# Altium PCB PCB2.PcbDoc
Units mil, origin at the board's own origin, x right, y up, seen from the top; angles counter-clockwise.
Board outline 1770 x 1435 mil, 2 copper layers (Top Layer, Bottom Layer); 11 components, 9 nets, 86 pads, 10 vias.
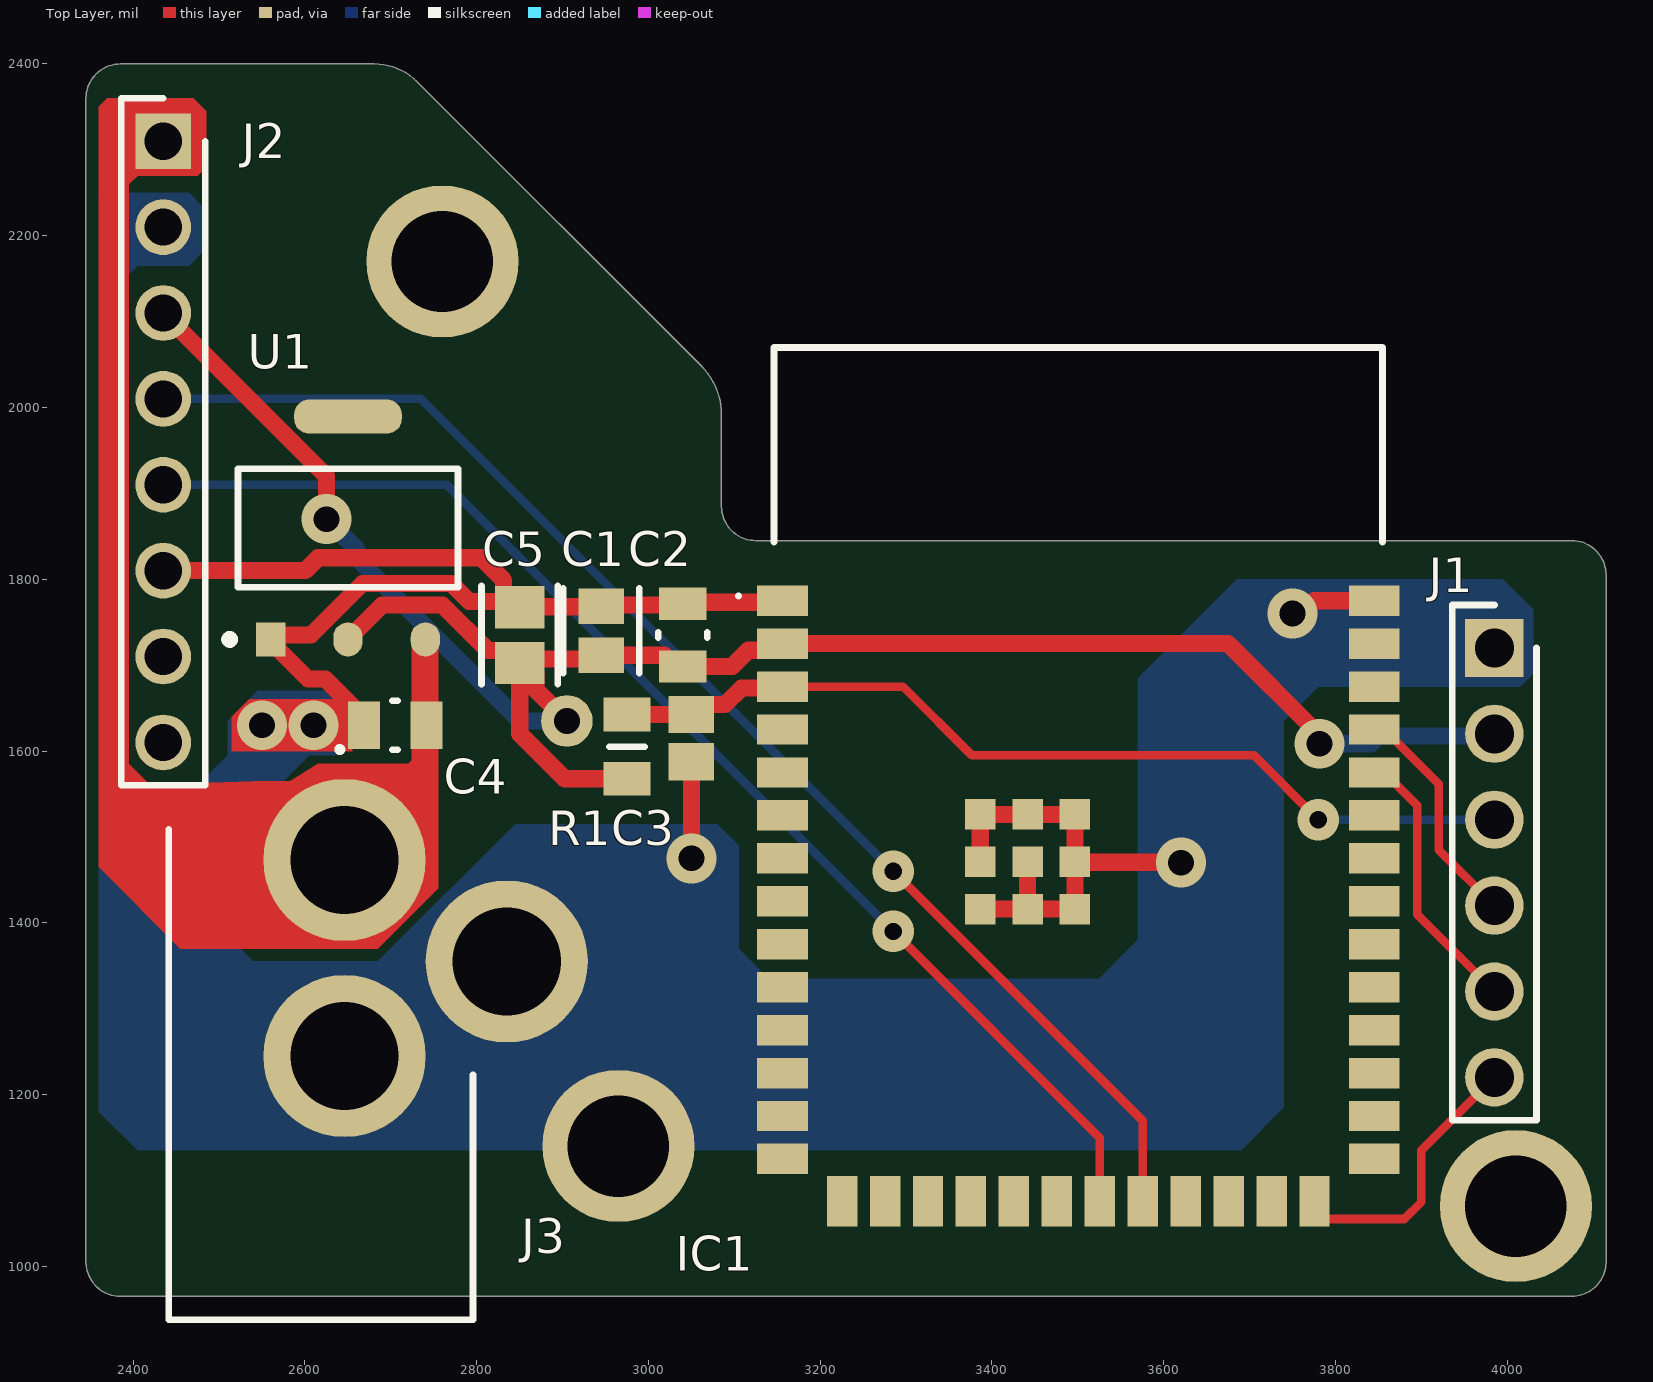
[diagram p0: Top Layer view]
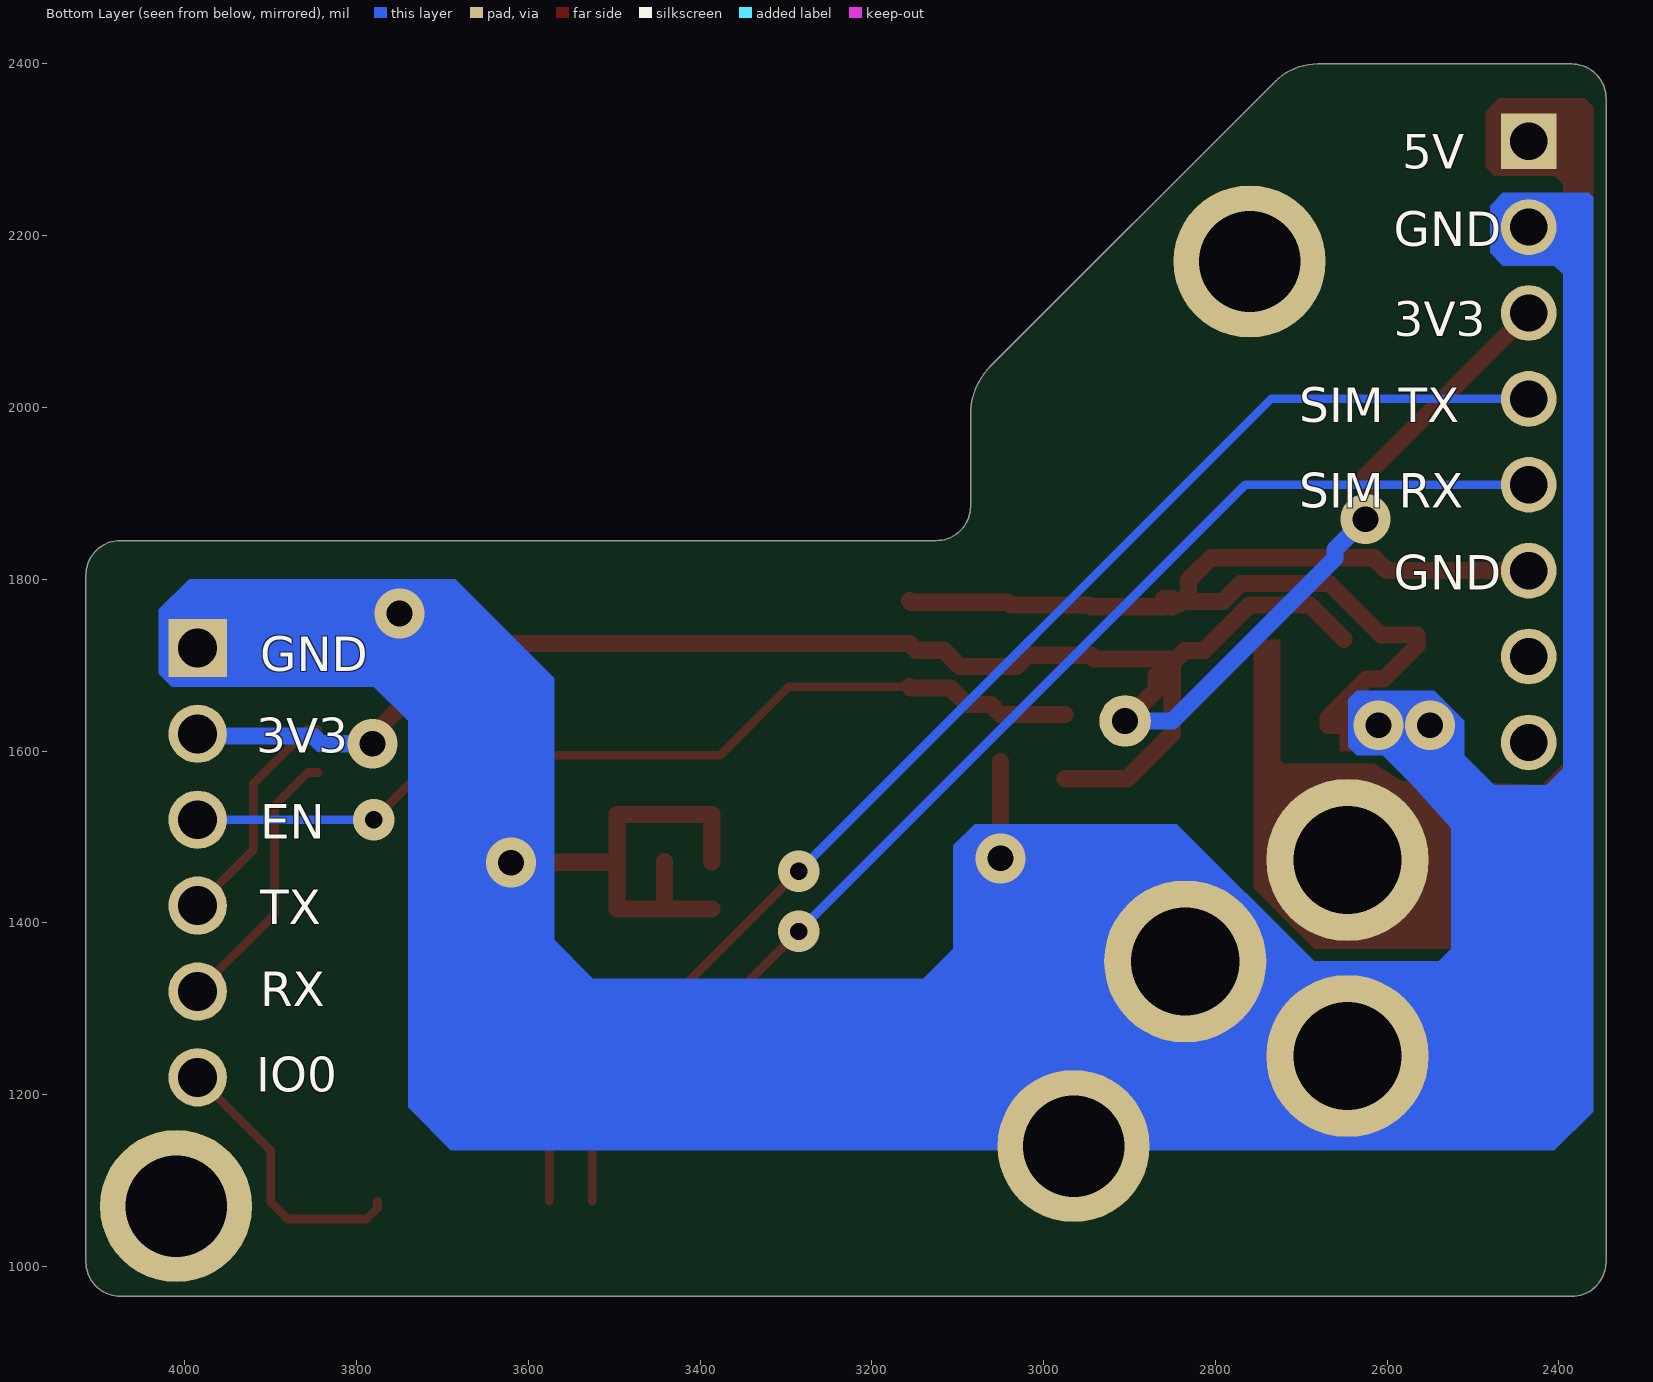
[diagram p1: Bottom Layer view, seen from below]
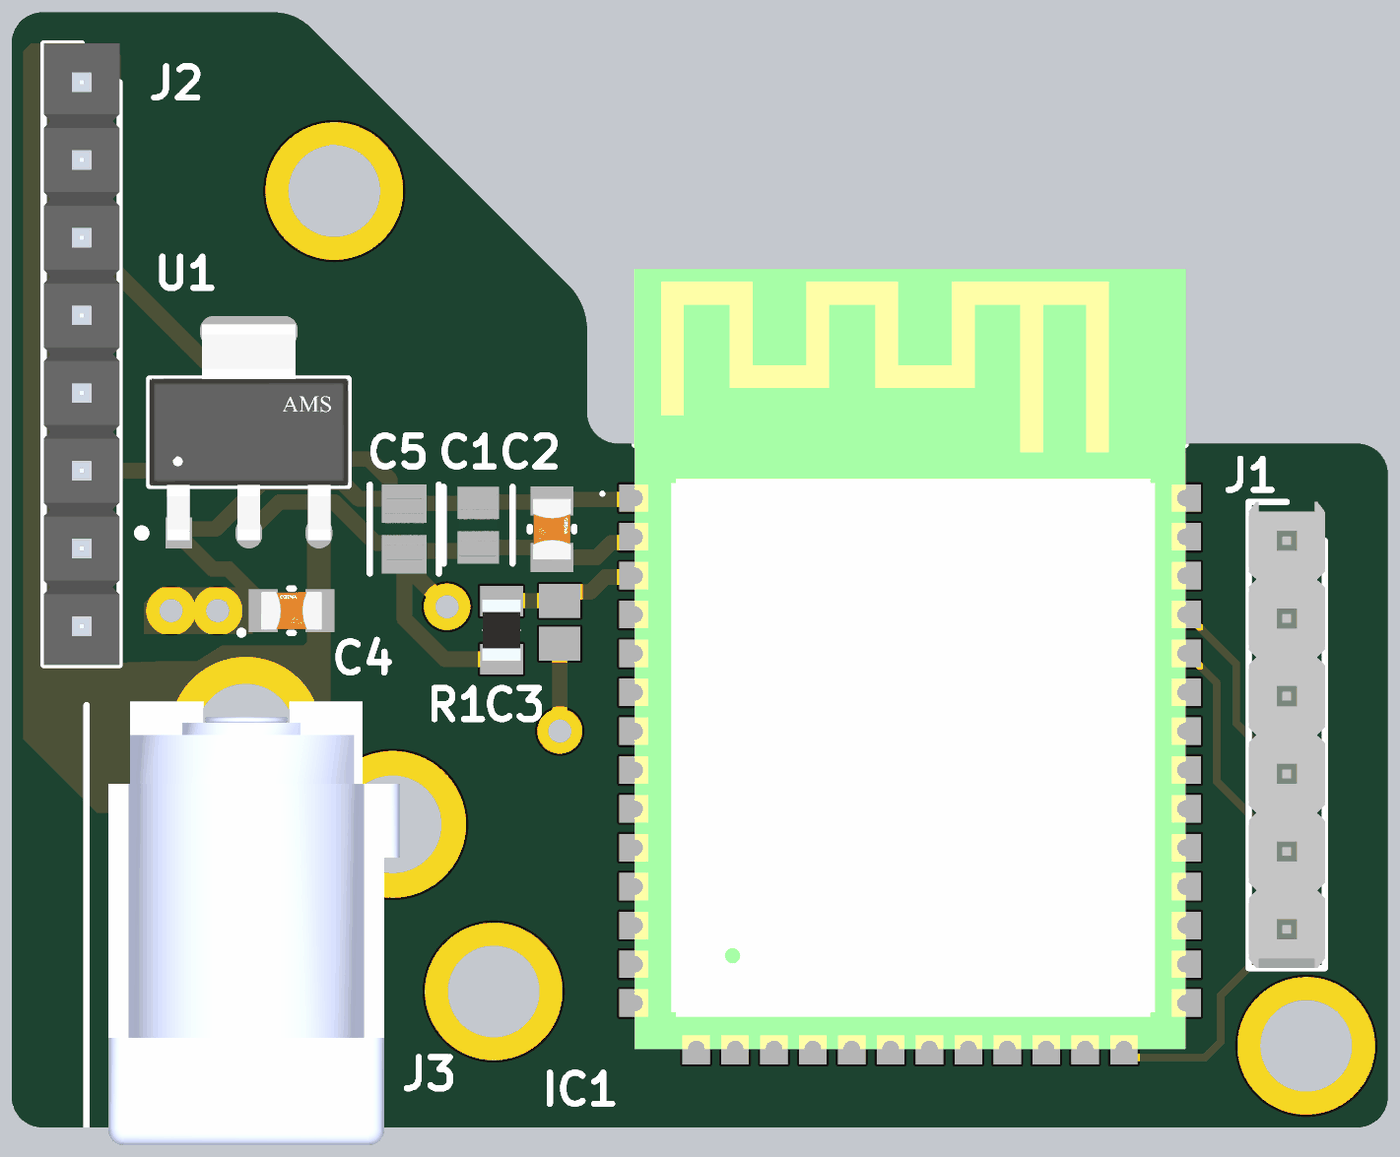
[diagram p2: 3D render of the assembled board from above, using the file's embedded part models]

## Layer stack, top to bottom
Top Solder: solder mask 0.4, Solder Resist, Dk 3.5
Top Layer: signal copper 1.4
Dielectric 1: dielectric 12.6, FR-4, Dk 4.8
Bottom Layer: signal copper 1.4
Bottom Solder: solder mask 0.4, Solder Resist, Dk 3.5

## Board outline
2730.61,2379.39 3060.86,2049.14 cw(c3002.59,1990.87) 3085,1990.86 3085,1885 ccw(c3125,1885) 3125,1845 4075,1845 cw(c4075,1805) 4115,1805 4115,1005 cw(c4075,1005) 4075,965 2385,965 cw(c2385,1005) 2345,1005 2345,2360 cw(c2385,2360) 2385,2400 2680.86,2400 cw(c2680.86,2329.66)

## Design rules (kind name [scope] priority, off if disabled: settings)
BoardOutlineClearance [All] p1: gap=7.87 ignorepadtopadclearanceinfootprint=FALSE
Clearance [All] p1: gap=5 ignorepadtopadclearanceinfootprint=FALSE except(9.84: Arc-Hole Track-Hole SMDPad-Hole THPad-Hole Via-Hole Fill-Hole Poly-Hole Region-Hole Text-Hole)
ComponentClearance [All] p1: gap=5 collisioncheckmode=3 verticalgap=5 showdistances=TRUE
DiffPairsRouting [All] p1: maxlimit=10 minlimit=5 mostfreqgap=5 toplayer_minwidth=5 toplayer_maxwidth=1000 toplayer_prefwidth=5 bottomlayer_minwidth=5 bottomlayer_maxwidth=1000 bottomlayer_prefwidth=5 maxuncoupledlength=500
Height [All] p1: minheight=0 maxheight=71497.94 prefheight=500
HoleSize [All] p1: absolutevalues=TRUE maxlimit=248.03 minlimit=11.81 maxpercent=80.000 minpercent=20.000
HoleToHoleClearance [All] p1: gap=9.84 allowstackedmicrovias=FALSE
MinimumAnnularRing [All] p1: minimumring=3
MinimumSolderMaskSliver [All] p1: minsoldermaskwidth=0
PlaneClearance [All] p1: clearance=5
PlaneConnect PlaneConnectPowerPads [InPadClass('PowerPads')] p1: planeconnectstyle=Direct reliefexpansion=20 reliefentries=4 reliefconductorwidth=10 reliefairgap=10
PlaneConnect [All] p2: pad.planeconnectstyle=Relief pad.reliefexpansion=11.81 pad.reliefentries=4 pad.reliefconductorwidth=5 pad.reliefairgap=5 via.planeconnectstyle=Direct via.reliefexpansion=11.81 via.reliefentries=4 via.reliefconductorwidth=5 via.reliefairgap=5
PolygonConnect PolygonConnectPowerPads [All vs (InPadClass('PowerPads'))] p1: connectstyle=Direct reliefconductorwidth=10 reliefentries=4 polygonreliefangle="90 Angle" airgapwidth=10
PolygonConnect [All] p2: thpad.connectstyle=Relief thpad.reliefconductorwidth=5 thpad.reliefentries=4 thpad.polygonreliefangle="90 Angle" thpad.airgapwidth=5 smdpad.connectstyle=Relief smdpad.reliefconductorwidth=5 smdpad.reliefentries=4 smdpad.polygonreliefangle="90 Angle" smdpad.airgapwidth=5 via.connectstyle=Direct via.reliefconductorwidth=5 via.reliefentries=4 via.polygonreliefangle="90 Angle" via.airgapwidth=5
RoutingVias [All] p1: holewidth=11.81 width=23.62 viastyle="Through Hole" minholewidth=11.81 minwidth=23.62 maxholewidth=23.62 maxwidth=259.84
SilkToSilkClearance [All] p1: silktosilkclearance=0
SilkToSolderMaskClearance [IsPad] p1: minsilkscreentomaskgap=2.9 clearancetoexposedcopper=TRUE
SolderMaskExpansion [All] p1: expansion=2.95 istentingtop=FALSE
Width [All] p1: maxlimit=1000 minlimit=5 preferedwidth=5 minimp=50.000000 maximp=50.000000 favimp=50.000000
20 further rules are at their usual default settings.

## Classes and differential pairs
component class Sheet1: C1 C2 C3 C4 IC1 J1 J3 R1 U1

## Components (designator, comment, footprint, x,y, rotation, side; value= is the part's Value field where it differs from the comment)
C1 "22uF" FP-CL21-IPC_C 2945,1740 r90 top
C2 "CC0805KRX7R7BB104" FP-CC0805-0_85-MFG 3040,1735 r90 top value="100 nF"
C3 "1uF" CAPC2013X140X50LL20T25 3050,1615 r90 top
C4 "CC0805KRX7R7BB104" FP-CC0805-0_85-MFG 2705,1630 r180 top value="100 nF"
C5 "10uF" FP-CL21-IPC_B 2850,1735 r90 top
IC1 "ESP32-S3-WROOM-1-N8" ESP32S3WROOM1N8R2 3500.51,1567.91 r0 top
J1 "22-28-4060" HDRV6W66P0X254_1X6_1524X249X838P 3985,1720 r270 top
J2 "HTSW-108-07-G-S" HDRV8W64P0X254_1X8_2032X248X838P 2435,2310 r90 top
J3 "694106301002" 694106301002_1 2795.63,937.68 r90 top
R1 "10K" RESC2012X60N 2975,1605 r90 top
U1 "AMS1117-3.3" FP-AMS1117-IPC_C 2650.11,1859.67 r90 top

## Footprints (in the part's own frame and the unit in brackets; to place one, negate y for a bottom-side part, rotate by r counter-clockwise, add the part's x,y. Pads: shape width x height; smd on the part's side, far side on the other; paste and mask are expansions set on the pad)
694106301002_1 [mm]
  round 4.8 hole 3.2: 1(13.6,3.8) 2(7.8,3.8) 3(10.6,-1)
  silkscreen extent 0,0 16.93,9, body extent 0.12,-1.22 14.62,8.28, height 11.02
CAPC2013X140X50LL20T25 [mm] "Chip Capacitor, 2-Leads, Body 2.00x1.25mm, IPC High Density"
  rect 1.1x1.35 smd: 1(-0.7,0) 2(0.7,0)
  body extent -1.1,-0.72 1.1,0.72, height 1.4
ESP32S3WROOM1N8R2 [mm]
  rect 1.5x0.9 smd: 1(-8.75,5.26) 2(-8.75,3.99) 3(-8.75,2.72) 4(-8.75,1.45) 5(-8.75,0.18) 6(-8.75,-1.09) 7(-8.75,-2.36) 8(-8.75,-3.63) 9(-8.75,-4.9) 10(-8.75,-6.17) 11(-8.75,-7.44) 12(-8.75,-8.71) 13(-8.75,-9.98) 14(-8.75,-11.25) 27(8.75,-11.25) 28(8.75,-9.98) 29(8.75,-8.71) 30(8.75,-7.44) 31(8.75,-6.17) 32(8.75,-4.9) 33(8.75,-3.63) 34(8.75,-2.36) 35(8.75,-1.09) 36(8.75,0.18) 37(8.75,1.45) 38(8.75,2.72) 39(8.75,3.99) 40(8.75,5.26)
  rect 0.9x1.5 smd: 15(-6.985,-12.5) 16(-5.715,-12.5) 17(-4.445,-12.5) 18(-3.175,-12.5) 19(-1.905,-12.5) 20(-0.635,-12.5) 21(0.635,-12.5) 22(1.905,-12.5) 23(3.175,-12.5) 24(4.445,-12.5) 25(5.715,-12.5) 26(6.985,-12.5)
  rect 0.9x0.9 smd: 41(-1.5,-2.46) 42(-1.5,-1.06) 43(-2.9,-1.06) 44(-2.9,-2.46) 45(-2.9,-3.86) 46(-1.5,-3.86) 47(-0.1,-3.86) 48(-0.1,-2.46) 49(-0.1,-1.06)
  silkscreen extent -10.1,5.35 9,12.75, body extent -9,-12.75 9,12.75, height 2.7
FP-AMS1117-IPC_C [mm]
  rect 1.004x0.872 smd paste+0 mask+0: 1(-3.295,2.29)
  rrect100% 1.004x0.872 smd paste+0 mask+0: 2(-3.295,0) 3(-3.295,-2.29)
  rrect87% 1.004x3.182 smd paste+0 mask+0: 4(3.295,0)
  silkscreen extent -3.42,-3.25 1.75,3.62, body extent -3.9,-3.35 3.9,3.35, height 0.25
FP-CC0805-0_85-MFG [mm]
  rect 0.95x1.4 smd paste+0 mask+0: 1(-0.925,0) 2(0.925,0)
  silkscreen extent -0.08,-0.72 0.08,0.72, body extent -1.6,-1.05 1.6,1.05, height 0.25
FP-CL21-IPC_B [mil]
  rect 49.4x57.33 smd paste+0 mask+0: 1(-32.51,0) 2(32.51,0)
  silkscreen extent -57,-44 57,44, body extent -67,-39 67,39, height 10
FP-CL21-IPC_C [mil]
  rect 41.52x53.39 smd paste+0 mask+0: 1(-28.57,0) 2(28.57,0)
  silkscreen extent -49,-44 49,44, body extent -53,-32 53,32, height 10
HDRV6W66P0X254_1X6_1524X249X838P [mm]
  rect 1.725x1.725 hole 1.15: 1(0,0)
  round 1.725 hole 1.15: 2(2.54,0) 3(5.08,0) 4(7.62,0) 5(10.16,0) 6(12.7,0)
  silkscreen extent -1.27,-1.24 13.97,1.24, body extent -1.27,-1.24 13.97,1.24, height 8.38
HDRV8W64P0X254_1X8_2032X248X838P [mm]
  rect 1.65x1.65 hole 1.1: 1(0,0)
  round 1.65 hole 1.1: 2(-2.54,0) 3(-5.08,0) 4(-7.62,0) 5(-10.16,0) 6(-12.7,0) 7(-15.24,0) 8(-17.78,0)
  silkscreen extent -19.05,-1.24 1.27,1.24, body extent -19.05,-1.24 1.27,1.24, height 8.38
RESC2012X60N [mm]
  rect 1x1.4 smd: 1(-0.95,0) 2(0.95,0)
  silkscreen extent 0,-0.53 0,0.53, body extent -1,-0.63 1,0.63, height 0.6

## Part data
C1: library part CMP-13271-002990-1, "CL21 Series 0805 22uF 16V ±20% Tolerance X5R Multilayer Ceramic Chip Capacitor", Case Code (Imperial)=0805, Case Code (Metric)=2012, Max Operating Temperature=85°C, Min Operating Temperature=-55°C, Tolerance=20%, Voltage Rating=16V, Capacitance=22uF, Case/Package=0805, Length=0.079inch, Mount="Surface Mount", Packaging="Tape and Reel", Thickness=0.037inch, Width=0.049inch
C2 C4: library part CMP-1036-04402-6, "CAP CER 0.1UF 16V X7R 0805", Capacitance="100 nF", Manufacturer=Yageo, Package=CC0805-0.85, Temperature="-30°C to +85°C", Temperature Characteristic=X7R, Temperature Range High=+85°C, Temperature Range Low=-30°C, Tolerance=0.1, Voltage Rating="16 V", Automotive=No, Category=Cap, ComponentLink2Description=Datasheet, ComponentLink2URL=http://www.yageo.com/documents/recent/UPY-GPHC_Y5V_6.3V-to-50V_8.pdf, Device Class L1="Passive Components", Device Class L2=Capacitors, Device Class L3="Ceramic Capacitors", Digikey Description="CAP CER 0.1UF 16V X7R 0805", Footprint Url=http://www.yageo.com/exep/pages/download/literatures/UPY-C_GEN_24.pdf, Height=0.95mm, Ipc Land Pattern Name=CAPC200125X85, Lead Free=Yes, Manufacturer Part Number=CC0805KRX7R7BB104, Material=Ceramic, Mouser Description="Multilayer Ceramic Capacitors MLCC - SMD/SMT 100nF 16V X7R 10%", Octopart=https://octopart.com/cc0805krx7r7bb104-yageo-39467769, RoHS=TRUE
C3: library part CMP-2007-04674-1, Manufacturer="AVX Interconnect / Elco", Part Number=0805ZC105KAZ2A
C5: library part CMP-2000-06102-2, "CL21 Series 0805 10uF 16V ±10% Tolerance X5R Multilayer Ceramic Chip Capacitor", Case Code (Imperial)=0805, Case Code (Metric)=2012, Dielectric=X7R, Max Operating Temperature=85°C, Min Operating Temperature=-55°C, Package Quantity=1, Tolerance=10%, Voltage=16V, Capacitance=10uF, Case/Package=0805, Depth=1.25mm, Height=1.25mm, Lead Free="Lead Free", Length=2mm, Mount="Surface Mount", Packaging="Tape and Reel", Radiation Hardening=No, Thickness=0.055inch, Voltage Rating=16V, Voltage Rating (DC)=16V, Width=0.049inch
IC1: "Integrated Circuit", Manufacturer_Name="Espressif Systems", Mouser Part Number=356-ESP32-S3WROOM1N8, Datasheet Link=https://www.espressif.com/sites/default/files/documentation/esp32-s3-wroom-1_wroom-1u_datasheet_en.pdf, Height=3.25mm, Manufacturer_Part_Number=ESP32-S3-WROOM-1-N8, Mouser Price/Stock=https://www.mouser.co.uk/ProductDetail/Espressif-Systems/ESP32-S3-WROOM-1-N8?qs=Wj%2FVkw3K%252BMC1mq0KGPvoSQ%3D%3D
J1: "Connector", Manufacturer_Name=Molex, Mouser Part Number=538-22-28-4060, Datasheet Link=https://www.molex.com/pdm_docs/sd/022284060_sd.pdf, Height=8.38mm, Manufacturer_Part_Number=22-28-4060, Mouser Price/Stock=https://www.mouser.co.uk/ProductDetail/Molex/22-28-4060?qs=d9fIA1aNikSACgwI0d%252BTOw%3D%3D
J2: "Connector", Manufacturer_Name=SAMTEC, Mouser Part Number=200-HTSW10807GS, Arrow Part Number=HTSW-108-07-G-S, Arrow Price/Stock=https://www.arrow.com/en/products/htsw-108-07-g-s/samtec?region=nac, Datasheet Link=https://componentsearchengine.com/Datasheets/2/HTSW-108-07-G-S.pdf, Height=8.38mm, Manufacturer_Part_Number=HTSW-108-07-G-S, Mouser Price/Stock=https://www.mouser.co.uk/ProductDetail/Samtec/HTSW-108-07-G-S?qs=0lQeLiL1qyb%2Fksz39zrYSQ%3D%3D
J3: "Connector", Manufacturer_Name="Wurth Elektronik", Mouser Part Number=710-694106301002, Datasheet Link=https://datasheet.datasheetarchive.com/originals/distributors/Datasheets_SAMA/1c153bd2ba42bb51bda59ee4cd9765cd.pdf, Manufacturer_Part_Number=694106301002, Mouser Price/Stock=https://www.mouser.co.uk/ProductDetail/Wurth-Elektronik/694106301002?qs=a9WhcLg8qCwOEkcI62k5mA%3D%3D
R1: library part CMP0805AFX-1002ELF, "Resistor", Manufacturer_Name=Bourns, Mouser Part Number=652-CMP0805AFX-1002L, Arrow Part Number=CMP0805AFX-1002ELF, Arrow Price/Stock=https://www.arrow.com/en/products/cmp0805afx-1002elf/bourns?region=nac, Datasheet Link=https://ms.componentsearchengine.com/Datasheets/2/CMP0805AFX-1002ELF.pdf, Height=0.6mm, Manufacturer_Part_Number=CMP0805AFX-1002ELF, Mouser Price/Stock=https://www.mouser.co.uk/ProductDetail/Bourns/CMP0805AFX-1002ELF?qs=TiOZkKH1s2RdWJm6UffAxg%3D%3D
U1: library part CMP-209535-000001-1, "LDO Voltage Regulators 1A, 3.3V", Dropout Voltage=1.1V, Manufacturer="Advanced Monolithic Systems", Max Junction Temp=+125°C, Max Power Dissipation=1.2W, Max Supply Voltage=15V, Nominal Supply Current=5mA, Output Current=1A, Output Voltage=3.3V, Package=AMS1117, Temperature="-40°C to +125°C", Temperature Range Low=-40°C, Automotive=No, Category=IC, ComponentLink2Description=Datasheet, ComponentLink2URL=http://www.advanced-monolithic.com/pdf/ds1117.pdf, Device Class L1="Integrated Circuits (ICs)", Device Class L2="Power Management ICs", Device Class L3="Voltage Regulators - Linear", Height=1.8mm, Ipc Land Pattern Name=SOT229P700X180-4, Lead Free=Yes, Manufacturer Part Number=AMS1117-3.3, Number Of Outputs=1, Octopart=https://octopart.com/ams1117-3.3-advanced+monolithic+systems-25899300, Output Type=Fixed, RoHS=TRUE, Standoff Height=0.64mm, Temperature Range High=+125°C

## Free pads (board coordinates)
  round 177.16 hole 118.11: 36(2760,2170) 37(2965,1140) 38(4010,1070)
  round 60 hole 30: 39(2905,1635)

## Via types
v1: diameter 58, hole 30, Top Layer to Bottom Layer, 7 vias
v2: diameter 48, hole 20, Top Layer to Bottom Layer, 3 vias

## Nets (pads, with @x,y where several pads share a name; then routed paths per layer and width w, separated by ;. In a path a pad name is that pad's centre, name@x,y a point inside that pad or via, vN(x,y) a via of type N, cw(c..) or ccw(c..) an arc to the next point about the centre after c; other vN are vias at no path point)
3.3V: C1.1 C2.1 C5.1 IC1.2 J1.2 J2.3 pad.39 R1.1 U1.2 | length 2477.1
  Top Layer w20: J2.3 2625,1920 v1(2625,1870) ; U1.2 2650.11,1730.18 2689.93,1770 2760,1770 2812.81,1717.19 2835.3,1717.19 C5.1 ; pad.39 2868.67,1671.33 2868.67,1687.79 2866.46,1690 C5.1@2850,1690 ; R1.1 2902.4,1567.6 2850,1620 C5.1@2850,1690 ; v1(3781.47,1608.39) 3781.47,1618.53 3675,1725 IC1.2 3148.31,1717.28 3116.26,1717.28 3097.56,1698.58 C2.1 3031.14,1698.58 3018.3,1711.43 C1.1 2940.53,1706.96 2854.47,1706.96 C5.1 ; C5.1@2850,1690 C5.1
  Bottom Layer w20: v1(2625,1870) 2660.73,1834.27 2660.73,1824.27 2850,1635 pad.39 ; v1(3781.47,1608.39) 3841.36,1608.39 3850.47,1617.5 3982.5,1617.5 J1.2
+5: C4.1 J2.1 J3.1 U1.3
EN: C3.2 IC1.3 J1.3 R1.2 | length 1094.9
  Top Layer w10: IC1.3 3296.31,1675 3376.31,1595 3705,1595 v2(3780,1520)
  Top Layer w20: R1.2 2975.08,1642.48 C3.2@3049.92,1642.48 ; C3.2 3061.55,1654.11 3089.11,1654.11 3108.21,1673.21 3154.24,1673.21 IC1.3
  Bottom Layer w10: v2(3780,1520) 3958.25,1520 3980,1498.25 J1.3@3980,1495
GND: C1.2 C2.2 C3.1 C4.2 C5.2 IC1.1 IC1.40 IC1.41 IC1.42 IC1.43 IC1.44 IC1.45 IC1.46 IC1.47 IC1.48 IC1.49 J1.1 J2.2 J2.6 J3.2 J3.3 pad.37 U1.1 | length 2066.1
  Top Layer w20: J2.6 2600.35,1810 2615.35,1825 2805,1825 2831.33,1798.67 2831.33,1782.21 C5.2@2843.02,1770.53 ; v1(2610,1630) C4.2 2668.58,1638.86 2623.57,1683.87 2603.43,1683.87 2565.05,1722.24 2565.05,1735.05 2607.12,1735.05 2667.06,1795 2770.36,1795 2791.33,1774.02 C5.2@2831.33,1774.02 ; C5.2 2853.02,1770.53 2860,1777.51 C5.2@2850,1777.51 ; C5.2@2860,1768.04 2944.47,1768.04 C1.2 2946.42,1770 3038.58,1770 C2.2 3041.79,1773.21 3154.23,1773.21 IC1.1 ; v1(3050,1475) C3.1 ; IC1.45 IC1.46 ; IC1.44 IC1.43 IC1.42 IC1.49 IC1.48 ; IC1.41 IC1.46 ; v1(3620,1470) 3619.47,1470.53 3497.11,1470.53 IC1.48 ; v1(3750,1760) 3760.28,1760 3775.28,1775 IC1.40 ; IC1.46 IC1.47 IC1.48
  other v1: 2550,1630
IO0: IC1.26 J1.6 | length 326.3
  Top Layer w10: IC1.26 3775.51,1067.72 3788.23,1055 3880,1055 3900,1075 3900,1135 J1.6
RX: IC1.36 J1.5 | length 319.9
  Top Layer w10: IC1.36 3856.81,1575 3895,1536.81 3895,1410 J1.5
SIM_RX: IC1.21 J2.5 | length 1479.2
  Top Layer w10: v2(3285,1390) 3525.51,1149.49 IC1.21
  Bottom Layer w10: J2.5 2765,1910 v2(3285,1390)
SIM_TX: IC1.22 J2.4 | length 1582.4
  Top Layer w10: v2(3285,1460) 3575.51,1169.49 IC1.22
  Bottom Layer w10: J2.4 2735,2010 v2(3285,1460)
TX: IC1.37 J1.4 | length 269.9
  Top Layer w10: IC1.37 3856.81,1625 3920,1561.81 3920,1485 J1.4
pads on no net: IC1.4 IC1.5 IC1.6 IC1.7 IC1.8 IC1.9 IC1.10 IC1.11 IC1.12 IC1.13 IC1.14 IC1.15 IC1.16 IC1.17 IC1.18 IC1.19 IC1.20 IC1.23 IC1.24 IC1.25 IC1.27 IC1.28 IC1.29 IC1.30 IC1.31 IC1.32 IC1.33 IC1.34 IC1.35 IC1.38 IC1.39 J2.7 J2.8 U1.4

## Other copper
Top Layer:
  region net GND: 2655,1660 2535,1660 2515,1640 2515,1600 2655,1600
  region net +5: 2565.86,1554.14 2615,1585.12 2720.12,1585.12 2724.46,1589.46 2724.46,1729.69 2754.57,1730.42 2755,1730 2755,1445.12
  region net +5: 2540,1565 2755,1565 2755,1440 2685,1370 2455,1370 2360,1465 2360,2350 2370,2360 2470,2360 2485,2345 2485,2280 2475,2270 2405,2270 2395,2260 2395,1585 2419.17,1560.83
Bottom Layer:
  region net GND: 2572.3,1562.51 2609.79,1600 2572.73,1600 2565,1592.27 2565,1560
  region net GND: 2392.5,1582.5 2420,1555 2405,1540 2390,1555 2377.5,1567.5
  region net GND: 2520,1375 2545,1350 2540,1345 2520,1345
  region net GND: 2585,1355 2525,1355 2395,1485 2395,2155 2405,2165 2465,2165 2480,2180 2480,2235 2465,2250 2365,2250 2360,2245 2360,1180 2405,1135 2570,1135
  region net GND: 2567.73,1595 2635,1595 2645,1605 2645,1660 2635,1670 2545,1670 2516.74,1641.74
  region net GND: 2385,1560 2475,1560 2510,1595 2510,1635 2530,1655 2580,1655 2575,1650 2575,1580 2575,1566.23 2572.3,1562.51 2525,1510 2525,1430 2525,1355 2380,1355
  region net GND: 2525,1245 2585,1355 2685,1355 2845,1515 3080,1515 3105,1490 3105,1370 3140,1335 3525,1335 3570,1380 3570,1685 3685,1800 3995,1800 4030,1765 4030,1690 4015,1675 3780,1675 3740,1635 3740,1185 3690,1135 2570,1135

## Silkscreen, mask and mechanical layers (free items; w line width, h text height)
Bottom Overlay:
  text "5V" at 2582,2278 h40
  text "GND" at 2592,2188 h40
  text "3V3" at 2592,2083 h40
  text "SIM TX" at 2702,1983 h40
  text "SIM RX" at 2702,1883 h40
  text "GND" at 2592,1788 h40
  text "GND" at 3912,1693 h40
  text "3V3" at 3917,1598 h40
  text "EN" at 3912,1498 h40
  text "TX" at 3912,1398 h40
  text "RX" at 3912,1303 h40
  text "IO0" at 3917,1203 h40